# EAGLE board 12-3.3V_converter (EAGLE 9.3.0)
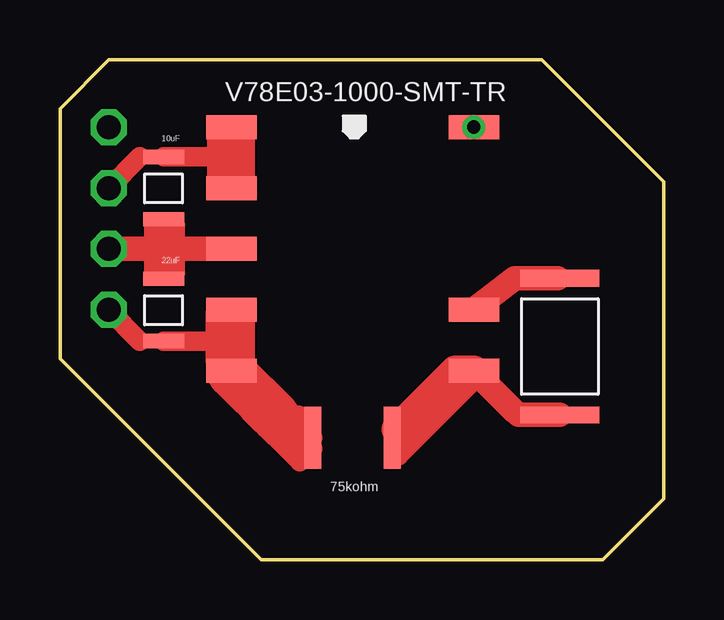
[diagram p0: board, top side]
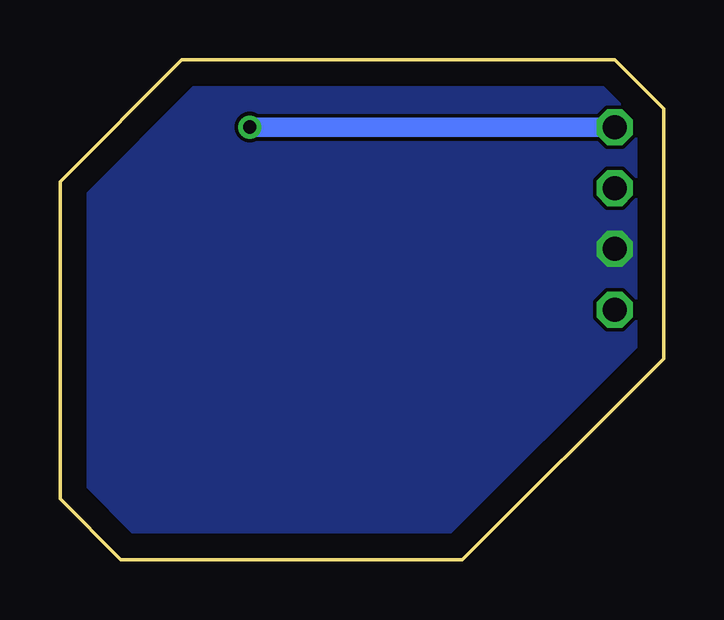
[diagram p1: board, bottom side, seen from below]

Size 25.15 x 20.83 mm. Coordinates in mm from the lower left corner, seen from the top.
Outline: 2.03,20.83 20.07,20.83 25.15,15.75 25.15,2.54 22.61,0 8.38,0 0,8.38 0,18.8 2.03,20.83
Copper layers (1*16): Top 0.035mm / dielectric 1.5mm / Bottom 0.035mm
Design rules "default": minimum track width 6mil, minimum drill 0.35mm, track to track 6mil, track to pad 6mil, pad to pad 6mil, via to via 6mil, smd to smd 6mil, copper to edge 40mil, drill to drill 6mil, minimum pad ring 10mil, minimum via ring 8mil, stop-mask expansion 4mil, vias tented up to drill 0mil, thermal gap 10mil

## Footprints (pad centres in the part's own frame; a part is rotated, then mirrored left to right if it is on the bottom)
V78E03-1000-SMT-TR = smd 1 x 2.1: GND_1 2.54,5.05; GND_2 0,-5.05; ON/OFF -5.08,5.05; VADJ 5.08,5.05; VIN_1 -5.08,-5.05; VIN_2 -2.54,-5.05; VOUT_1 2.54,-5.05; VOUT_2 5.08,-5.05
ESR25JZPF7502 = smd 0.7 x 2.6: P$1 -1.65,-0.01; P$2 1.66,-0.01
CRGP2512F22K = smd 0.7 x 3.3: P$1 2.85,0; P$2 -2.85,0
GRT31CR61H106KE01L = smd 0.6 x 1.7: P$1 -1.3,0; P$2 1.3,0
GRT31CC81C226KE01L = smd 0.6 x 1.7: P$1 -1.3,0; P$2 1.3,0

## Placement (x,y rotation side)
E$1  [V78E03-1000-SMT-TR]  12.19,12.95 270 top
E$2  [ESR25JZPF7502]  12.19,5.08 180 top
E$3  [CRGP2512F22K]  20.83,8.89 90 top
E$4  [GRT31CR61H106KE01L]  4.32,15.49 90 top
E$5  [GRT31CC81C226KE01L]  4.32,10.41 90 top

## Library data of the parts
E$1-E$5 = Library_Capstone

## Nets
S$1: E$1.VIN_1 E$1.VIN_2 E$4.P$2
S$2: E$1.ON/OFF
S$3: E$1.VOUT_1 E$1.VOUT_2 E$2.P$2 E$5.P$1
S$4: E$1.VADJ E$2.P$1 E$3.P$2
S$5: E$1.GND_1 E$3.P$1
S$6: E$1.GND_2 E$4.P$1 E$5.P$2

## Tracks (layer width: path | path; a pad name or v marks a point on that pad's centre or on a via)
S$1  (via drill 1)
  Top 0.152: E$1.VIN_2 7.25,15.61 7.76,15.61 7.87,15.49 | E$1.VIN_1 7.87,18.03 | 6.16,16.79 6.89,17.53 | E$4.P$2 3.33,16.79
  Top 0.203: E$1.VIN_1 7.14,17.78 6.89,17.53 | E$1.VIN_2 7.14,16 6.89,16
  Top 0.508: 7.87,18.03 7.87,15.49
  Top 0.813: E$4.P$2 6.16,16.79 | 3.33,16.79 v2.03,15.49
  Top 1.524: 6.89,17.53 6.89,16
S$2  (via drill 0.55, 1)
  Bottom 0.813: E$1.ON/OFF v2.03,18.03
  other vias: 17.24,18.03
S$3  (via drill 1)
  Top 0.152: 6.76,9.11 6.76,10.27 E$1.VOUT_1 7.62,10.41 | 10.13,4.74 10.18,4.74 E$2.P$2 10.53,4.63 | 7.62,8.13 7.4,8.13 E$1.VOUT_2 7.14,7.79 7.16,7.77 | E$5.P$1 3.33,9.11
  Top 0.406: 10.13,4.74 9.92,5.91
  Top 0.813: 6.76,9.11 E$5.P$1 | E$2.P$2 10.5,5.12 8.95,5.12 7.91,6.16 | 3.33,9.11 v2.03,10.41 | 10.53,4.63 9.99,4.08 8.57,5.5
  Top 1.016: 9.02,5.91 9.92,5.91 | 7.62,10.41 7.62,8.13
  Top 1.27: 6.71,10.26 6.71,8.31 E$1.VOUT_2
  Top 2.032: 9.02,5.91 7.16,7.77
S$4
  Top 0.152: 20.82,6.05 E$3.P$2 | 19.12,6.05 18.92,6.2 | E$1.VADJ 17.24,7.46 | 14.12,4.34 13.79,4.34 13.79,6.07 13.67,6.19
  Top 0.254: 14.04,5.44 14.39,5.09 E$2.P$1
  Top 0.813: 17.24,7.46 14.12,4.34
  Top 1.016: 19.12,6.05 20.82,6.05 | 18.92,6.2 E$1.VADJ
  Top 1.27: E$1.VADJ 16.47,7.87 14.04,5.44
S$5
  Top 0.152: 20.74,11.74 E$3.P$1
  Top 1.016: 20.74,11.74 18.95,11.74 E$1.GND_1
S$6  (via drill 1)
  Top 0.152: 4.01,12.09 4.32,11.97 E$5.P$2 4.54,11.94 4.83,11.94 | E$4.P$1 4.6,14.19 4.83,13.97
  Top 0.203: E$4.P$1 4.01,13.89
  Top 0.762: 4.83,13.97 4.83,12.95 4.83,11.94
  Top 1.016: 4.01,13.89 4.01,12.09 | v2.03,12.95 4.83,12.95 E$1.GND_2
  pour Bottom: 2.03,20.57 20.07,20.57 24.89,15.75 24.89,2.79 22.61,0.51 8.38,0.51 0.25,8.64 0.25,18.8